# EAGLE board muneeb v6 (EAGLE 9.7.0)
NAMES: Juta
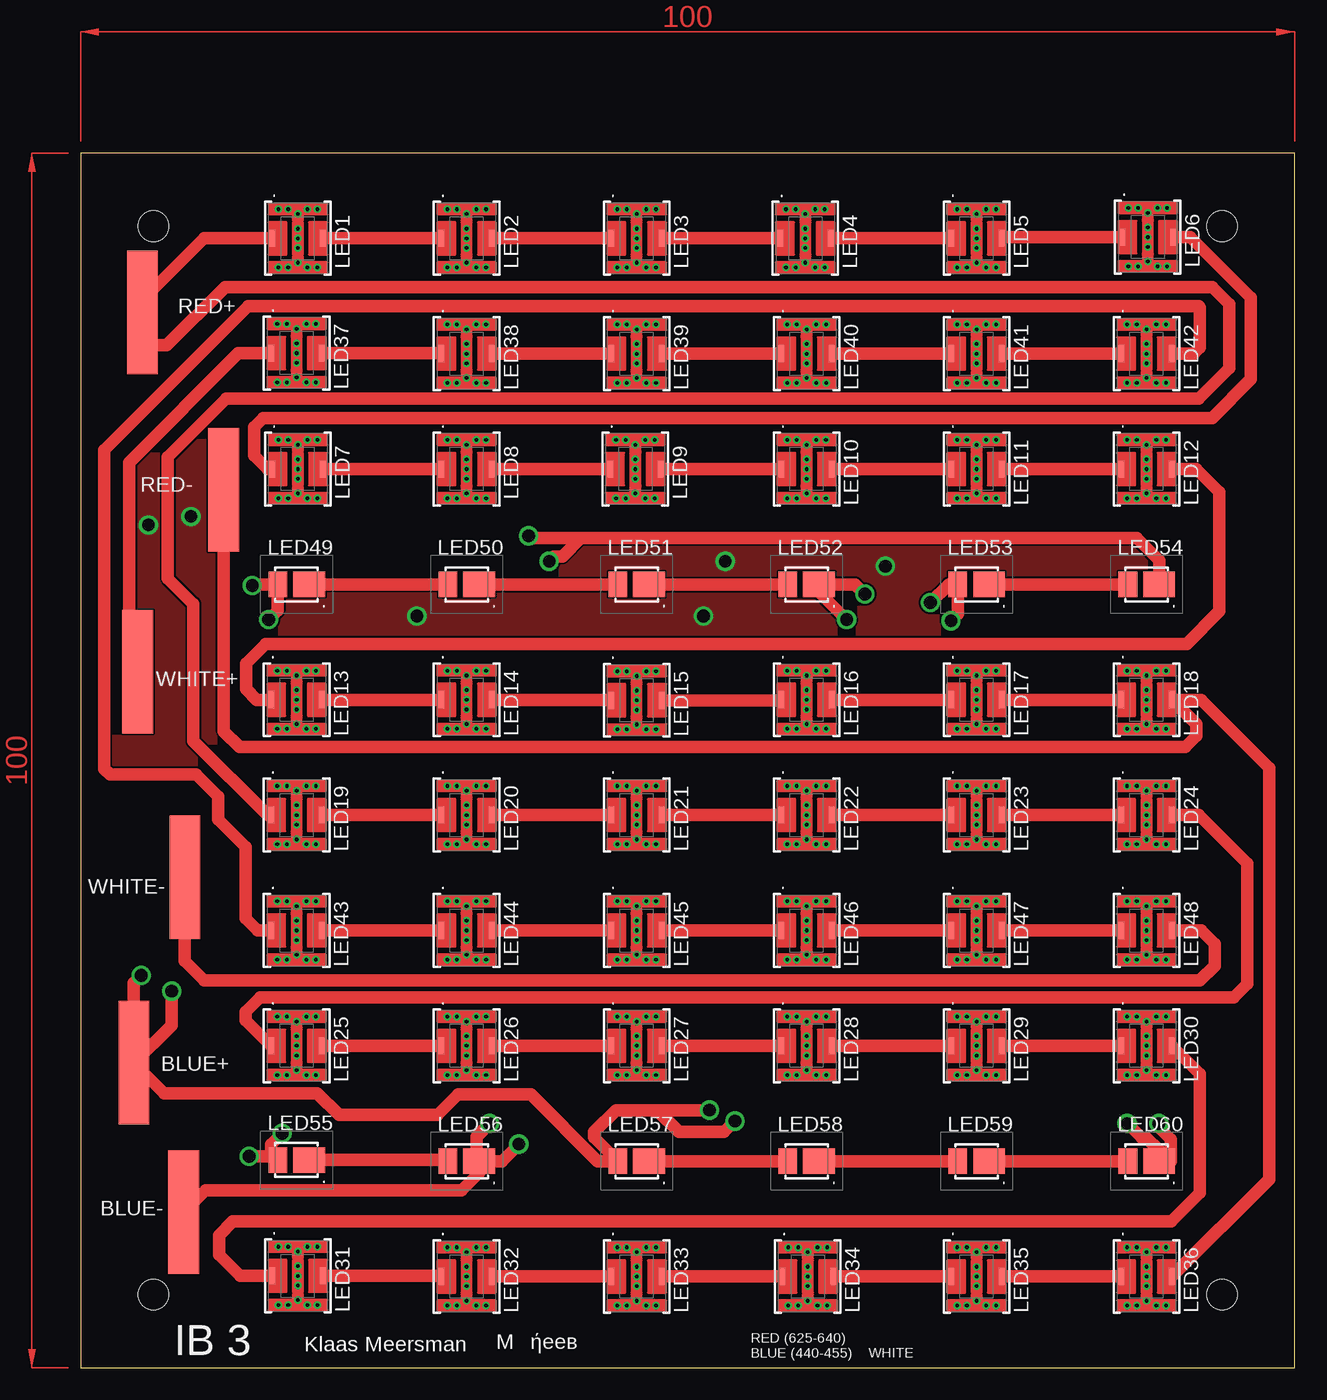
[diagram p0: board, top side]
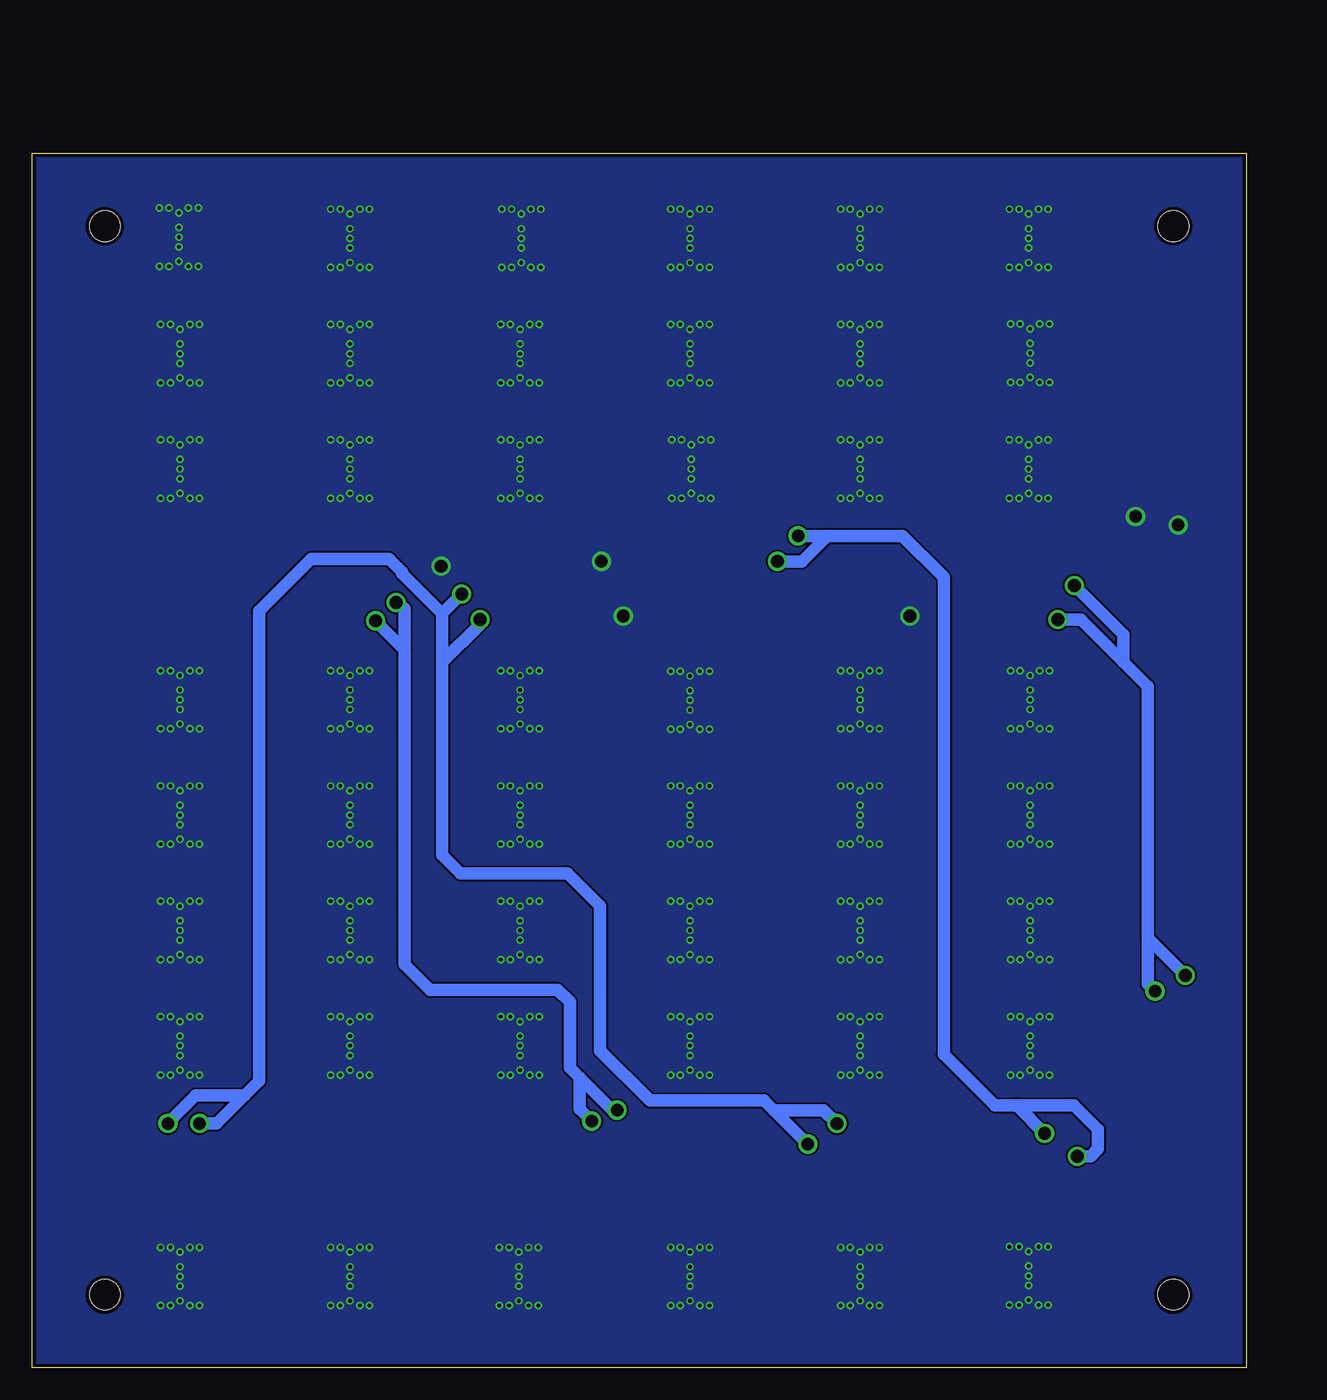
[diagram p1: board, bottom side, seen from below]

Size 99.99 x 100 mm. Coordinates in mm from the lower left corner, seen from the top.
Outline: 0,0 99.99,0 99.99,100 0,100 0,0
Copper layers (1*16): Top 0.035mm / dielectric 1.5mm / Bottom 0.035mm
Design rules "PCBWay_2L_152um-Track": minimum track width 6mil, minimum drill 0.3mm, track to track 6mil, track to pad 6mil, pad to pad 6mil, via to via 6mil, smd to smd 0mil, copper to edge 0.3mm, drill to drill 10mil, minimum pad ring 6mil, minimum via ring 0.1mm, stop-mask expansion 2mil, vias tented up to drill 0.45mm, thermal gap 0.2mm
Net classes: 0 default: width 0.5 mm, drill 0.3 mm, clearance 0.1 mm
Holes 2.5 mm at 6,94 94,94 94,6 6,6

## Footprints (pad centres in the part's own frame; a part is rotated, then mirrored left to right if it is on the bottom)
SOLDERPAD = smd 2.54 x 10.16: 1 0,0
GR_CSSRML.24 = smd 1.4 x 0.5: 1 0,2.1; 2 0,-2.1 | drill 0.3 pad 0.61: GND 0,0; P$1 0.8,0; P$3 -0.8,0; P$5 -2,0; P$6 -2.4,0.8; P$7 -2.4,1.6; P$8 -2.4,-0.8; P$9 -2.4,-1.6; P$11 2,0; P$12 2.4,0.8; P$13 2.4,1.6; P$14 2.4,-0.8; P$15 2.4,-1.6
GD_JTLPSI1.14 = smd 2.62 x 2.1: 1 -1.03,0 | smd 1.53 x 2.1: 2 1.545,0

## Placement (x,y rotation side)
BLUE+  [SOLDERPAD]  4.4,25.1 180 top
BLUE-  [SOLDERPAD]  8.5,12.8 180 top
LED1  [GR_CSSRML.24]  17.9,93 90 top
LED2  [GR_CSSRML.24]  31.8,93 90 top
LED3  [GR_CSSRML.24]  45.8,93 90 top
LED4  [GR_CSSRML.24]  59.7,93 90 top
LED5  [GR_CSSRML.24]  73.8,93 90 top
LED6  [GR_CSSRML.24]  87.9,93.1 90 top
LED7  [GR_CSSRML.24]  17.9,74 90 top
LED8  [GR_CSSRML.24]  31.8,74 90 top
LED9  [GR_CSSRML.24]  45.7,74 90 top
LED10  [GR_CSSRML.24]  59.8,74 90 top
LED11  [GR_CSSRML.24]  73.8,74 90 top
LED12  [GR_CSSRML.24]  87.8,74 90 top
LED13  [GR_CSSRML.24]  17.8,55 90 top
LED14  [GR_CSSRML.24]  31.8,55 90 top
LED15  [GR_CSSRML.24]  45.8,54.96 90 top
LED16  [GR_CSSRML.24]  59.8,55 90 top
LED17  [GR_CSSRML.24]  73.8,55 90 top
LED18  [GR_CSSRML.24]  87.8,55 90 top
LED19  [GR_CSSRML.24]  17.8,45.5 90 top
LED20  [GR_CSSRML.24]  31.8,45.5 90 top
LED21  [GR_CSSRML.24]  45.8,45.5 90 top
LED22  [GR_CSSRML.24]  59.8,45.5 90 top
LED23  [GR_CSSRML.24]  73.8,45.5 90 top
LED24  [GR_CSSRML.24]  87.8,45.5 90 top
LED25  [GR_CSSRML.24]  17.8,26.5 90 top
LED26  [GR_CSSRML.24]  31.8,26.5 90 top
LED27  [GR_CSSRML.24]  45.8,26.5 90 top
LED28  [GR_CSSRML.24]  59.8,26.5 90 top
LED29  [GR_CSSRML.24]  73.8,26.5 90 top
LED30  [GR_CSSRML.24]  87.8,26.5 90 top
LED31  [GR_CSSRML.24]  17.9,7.55 90 top
LED32  [GR_CSSRML.24]  31.8,7.5 90 top
LED33  [GR_CSSRML.24]  45.8,7.5 90 top
LED34  [GR_CSSRML.24]  59.9,7.5 90 top
LED35  [GR_CSSRML.24]  73.8,7.5 90 top
LED36  [GR_CSSRML.24]  87.8,7.5 90 top
LED37  [GR_CSSRML.24]  17.8,83.55 90 top
LED38  [GR_CSSRML.24]  31.8,83.5 90 top
LED39  [GR_CSSRML.24]  45.8,83.5 90 top
LED40  [GR_CSSRML.24]  59.8,83.5 90 top
LED41  [GR_CSSRML.24]  73.8,83.5 90 top
LED42  [GR_CSSRML.24]  87.8,83.5 90 top
LED43  [GR_CSSRML.24]  17.8,36 90 top
LED44  [GR_CSSRML.24]  31.8,36 90 top
LED45  [GR_CSSRML.24]  45.8,36 90 top
LED46  [GR_CSSRML.24]  59.8,36 90 top
LED47  [GR_CSSRML.24]  73.8,36 90 top
LED48  [GR_CSSRML.24]  87.8,36 90 top
LED49  [GD_JTLPSI1.14]  17.8,64.5 180 top
LED50  [GD_JTLPSI1.14]  31.8,64.5 180 top
LED51  [GD_JTLPSI1.14]  45.8,64.5 180 top
LED52  [GD_JTLPSI1.14]  59.8,64.5 180 top
LED53  [GD_JTLPSI1.14]  73.8,64.5 180 top
LED54  [GD_JTLPSI1.14]  87.8,64.5 180 top
LED55  [GD_JTLPSI1.14]  17.8,17.1 180 top
LED56  [GD_JTLPSI1.14]  31.8,17 180 top
LED57  [GD_JTLPSI1.14]  45.8,17 180 top
LED58  [GD_JTLPSI1.14]  59.8,17 180 top
LED59  [GD_JTLPSI1.14]  73.8,17 180 top
LED60  [GD_JTLPSI1.14]  87.8,17 180 top
RED+  [SOLDERPAD]  5.1,86.9 180 top
RED-  [SOLDERPAD]  11.8,72.3 180 top
WHITE+  [SOLDERPAD]  4.7,57.3 180 top
WHITE-  [SOLDERPAD]  8.6,40.4 180 top

## Library data of the parts
BLUE+ BLUE- RED+ RED- WHITE+ WHITE- = LibraryLEDs
LED1-LED48 = OSRAM LED
LED49-LED60 = OSRAM LED; DESCRIPTION: High Power LEDs - Single Color 2835 Mid-Power ColorFar Red 720-740nm; HEIGHT: mm; MANUFACTURER_NAME: CREE LED; MANUFACTURER_PART_NUMBER: JE2835AFR-N-0001A0000-N0000001; MOUSER_PART_NUMBER: 941-JE2835AFRN01AN; MOUSER_PRICE-STOCK: https://www.mouser.co.uk/ProductDetail/Cree-LED/JE2835AFR-N-0001A0000-N0000001?qs=tlsG%2FOw5FFhxeS5Ond46kw%3D%3D

## Nets
GND: LED1.GND LED1.P$1 LED1.P$3 LED1.P$5 LED1.P$6 LED1.P$7 LED1.P$8 LED1.P$9 LED1.P$11 LED1.P$12 LED1.P$13 LED1.P$14 LED1.P$15 LED2.GND LED2.P$1 LED2.P$3 LED2.P$5 LED2.P$6 LED2.P$7 LED2.P$8 LED2.P$9 LED2.P$11 LED2.P$12 LED2.P$13 LED2.P$14 LED2.P$15 LED3.GND LED3.P$1 LED3.P$3 LED3.P$5 LED3.P$6 LED3.P$7 LED3.P$8 LED3.P$9 LED3.P$11 LED3.P$12 LED3.P$13 LED3.P$14 LED3.P$15 LED4.GND LED4.P$1 LED4.P$3 LED4.P$5 LED4.P$6 LED4.P$7 LED4.P$8 LED4.P$9 LED4.P$11 LED4.P$12 LED4.P$13 LED4.P$14 LED4.P$15 LED5.GND LED5.P$1 LED5.P$3 LED5.P$5 LED5.P$6 LED5.P$7 LED5.P$8 LED5.P$9 LED5.P$11 LED5.P$12 LED5.P$13 LED5.P$14 LED5.P$15 LED6.GND LED6.P$1 LED6.P$3 LED6.P$5 LED6.P$6 LED6.P$7 LED6.P$8 LED6.P$9 LED6.P$11 LED6.P$12 LED6.P$13 LED6.P$14 LED6.P$15 LED7.GND LED7.P$1 LED7.P$3 LED7.P$5 LED7.P$6 LED7.P$7 LED7.P$8 LED7.P$9 LED7.P$11 LED7.P$12 LED7.P$13 LED7.P$14 LED7.P$15 LED8.GND LED8.P$1 LED8.P$3 LED8.P$5 LED8.P$6 LED8.P$7 LED8.P$8 LED8.P$9 LED8.P$11 LED8.P$12 LED8.P$13 LED8.P$14 LED8.P$15 LED9.GND LED9.P$1 LED9.P$3 LED9.P$5 LED9.P$6 LED9.P$7 LED9.P$8 LED9.P$9 LED9.P$11 LED9.P$12 LED9.P$13 LED9.P$14 LED9.P$15 LED10.GND LED10.P$1 LED10.P$3 LED10.P$5 LED10.P$6 LED10.P$7 LED10.P$8 LED10.P$9 LED10.P$11 LED10.P$12 LED10.P$13 LED10.P$14 LED10.P$15 LED11.GND LED11.P$1 LED11.P$3 LED11.P$5 LED11.P$6 LED11.P$7 LED11.P$8 LED11.P$9 LED11.P$11 LED11.P$12 LED11.P$13 LED11.P$14 LED11.P$15 LED12.GND LED12.P$1 LED12.P$3 LED12.P$5 LED12.P$6 LED12.P$7 LED12.P$8 LED12.P$9 LED12.P$11 LED12.P$12 LED12.P$13 LED12.P$14 LED12.P$15 LED13.GND LED13.P$1 LED13.P$3 LED13.P$5 LED13.P$6 LED13.P$7 LED13.P$8 LED13.P$9 LED13.P$11 LED13.P$12 LED13.P$13 LED13.P$14 LED13.P$15 LED14.GND LED14.P$1 LED14.P$3 LED14.P$5 LED14.P$6 LED14.P$7 LED14.P$8 LED14.P$9 LED14.P$11 LED14.P$12 LED14.P$13 LED14.P$14 LED14.P$15 LED15.GND LED15.P$1 LED15.P$3 LED15.P$5 LED15.P$6 LED15.P$7 LED15.P$8 LED15.P$9 LED15.P$11 LED15.P$12 LED15.P$13 LED15.P$14 LED15.P$15 LED16.GND LED16.P$1 LED16.P$3 LED16.P$5 LED16.P$6 LED16.P$7 LED16.P$8 LED16.P$9 LED16.P$11 LED16.P$12 LED16.P$13 LED16.P$14 LED16.P$15 LED17.GND LED17.P$1 LED17.P$3 LED17.P$5 LED17.P$6 LED17.P$7 LED17.P$8 LED17.P$9 LED17.P$11 LED17.P$12 LED17.P$13 LED17.P$14 LED17.P$15 LED18.GND LED18.P$1 LED18.P$3 LED18.P$5 LED18.P$6 LED18.P$7 LED18.P$8 LED18.P$9 LED18.P$11 LED18.P$12 LED18.P$13 LED18.P$14 LED18.P$15 LED19.GND LED19.P$1 LED19.P$3 LED19.P$5 LED19.P$6 LED19.P$7 LED19.P$8 LED19.P$9 LED19.P$11 LED19.P$12 LED19.P$13 LED19.P$14 LED19.P$15 LED20.GND LED20.P$1 LED20.P$3 LED20.P$5 LED20.P$6 LED20.P$7 LED20.P$8 LED20.P$9 LED20.P$11 LED20.P$12 LED20.P$13 LED20.P$14 LED20.P$15 LED21.GND LED21.P$1 LED21.P$3 LED21.P$5 LED21.P$6 LED21.P$7 LED21.P$8 LED21.P$9 LED21.P$11 LED21.P$12 LED21.P$13 LED21.P$14 LED21.P$15 LED22.GND LED22.P$1 LED22.P$3 LED22.P$5 LED22.P$6 LED22.P$7 LED22.P$8 LED22.P$9 LED22.P$11 LED22.P$12 LED22.P$13 LED22.P$14 LED22.P$15 LED23.GND LED23.P$1 LED23.P$3 LED23.P$5 LED23.P$6 LED23.P$7 LED23.P$8 LED23.P$9 LED23.P$11 LED23.P$12 LED23.P$13 LED23.P$14 LED23.P$15 LED24.GND LED24.P$1 LED24.P$3 LED24.P$5 LED24.P$6 LED24.P$7 LED24.P$8 LED24.P$9 LED24.P$11 LED24.P$12 LED24.P$13 LED24.P$14 LED24.P$15 LED25.GND LED25.P$1 LED25.P$3 LED25.P$5 LED25.P$6 LED25.P$7 LED25.P$8 LED25.P$9 LED25.P$11 LED25.P$12 LED25.P$13 LED25.P$14 LED25.P$15 LED26.GND LED26.P$1 LED26.P$3 LED26.P$5 LED26.P$6 LED26.P$7 LED26.P$8 LED26.P$9 LED26.P$11 LED26.P$12 LED26.P$13 LED26.P$14 LED26.P$15 LED27.GND LED27.P$1 LED27.P$3 LED27.P$5 LED27.P$6 LED27.P$7 LED27.P$8 LED27.P$9 LED27.P$11 LED27.P$12 LED27.P$13 LED27.P$14 LED27.P$15 LED28.GND LED28.P$1 LED28.P$3 LED28.P$5 LED28.P$6 LED28.P$7 LED28.P$8 LED28.P$9 LED28.P$11 LED28.P$12 LED28.P$13 LED28.P$14 LED28.P$15 LED29.GND LED29.P$1 LED29.P$3 LED29.P$5 LED29.P$6 LED29.P$7 LED29.P$8 LED29.P$9 LED29.P$11 LED29.P$12 LED29.P$13 LED29.P$14 LED29.P$15 LED30.GND LED30.P$1 LED30.P$3 LED30.P$5 LED30.P$6 LED30.P$7 LED30.P$8 LED30.P$9 LED30.P$11 LED30.P$12 LED30.P$13 LED30.P$14 LED30.P$15 LED31.GND LED31.P$1 LED31.P$3 LED31.P$5 LED31.P$6 LED31.P$7 LED31.P$8 LED31.P$9 LED31.P$11 LED31.P$12 LED31.P$13 LED31.P$14 LED31.P$15 LED32.GND LED32.P$1 LED32.P$3 LED32.P$5 LED32.P$6 LED32.P$7 LED32.P$8 LED32.P$9 LED32.P$11 LED32.P$12 LED32.P$13 LED32.P$14 LED32.P$15 LED33.GND LED33.P$1 LED33.P$3 LED33.P$5 LED33.P$6 LED33.P$7 LED33.P$8 LED33.P$9 LED33.P$11 LED33.P$12 LED33.P$13 LED33.P$14 LED33.P$15 LED34.GND LED34.P$1 LED34.P$3 LED34.P$5 LED34.P$6 LED34.P$7 LED34.P$8 LED34.P$9 LED34.P$11 LED34.P$12 LED34.P$13 LED34.P$14 LED34.P$15 LED35.GND LED35.P$1 LED35.P$3 LED35.P$5 LED35.P$6 LED35.P$7 LED35.P$8 LED35.P$9 LED35.P$11 LED35.P$12 LED35.P$13 LED35.P$14 LED35.P$15 LED36.GND LED36.P$1 LED36.P$3 LED36.P$5 LED36.P$6 LED36.P$7 LED36.P$8 LED36.P$9 LED36.P$11 LED36.P$12 LED36.P$13 LED36.P$14 LED36.P$15 LED37.GND LED37.P$1 LED37.P$3 LED37.P$5 LED37.P$6 LED37.P$7 LED37.P$8 LED37.P$9 LED37.P$11 LED37.P$12 LED37.P$13 LED37.P$14 LED37.P$15 LED38.GND LED38.P$1 LED38.P$3 LED38.P$5 LED38.P$6 LED38.P$7 LED38.P$8 LED38.P$9 LED38.P$11 LED38.P$12 LED38.P$13 LED38.P$14 LED38.P$15 LED39.GND LED39.P$1 LED39.P$3 LED39.P$5 LED39.P$6 LED39.P$7 LED39.P$8 LED39.P$9 LED39.P$11 LED39.P$12 LED39.P$13 LED39.P$14 LED39.P$15 LED40.GND LED40.P$1 LED40.P$3 LED40.P$5 LED40.P$6 LED40.P$7 LED40.P$8 LED40.P$9 LED40.P$11 LED40.P$12 LED40.P$13 LED40.P$14 LED40.P$15 LED41.GND LED41.P$1 LED41.P$3 LED41.P$5 LED41.P$6 LED41.P$7 LED41.P$8 LED41.P$9 LED41.P$11 LED41.P$12 LED41.P$13 LED41.P$14 LED41.P$15 LED42.GND LED42.P$1 LED42.P$3 LED42.P$5 LED42.P$6 LED42.P$7 LED42.P$8 LED42.P$9 LED42.P$11 LED42.P$12 LED42.P$13 LED42.P$14 LED42.P$15 LED43.GND LED43.P$1 LED43.P$3 LED43.P$5 LED43.P$6 LED43.P$7 LED43.P$8 LED43.P$9 LED43.P$11 LED43.P$12 LED43.P$13 LED43.P$14 LED43.P$15 LED44.GND LED44.P$1 LED44.P$3 LED44.P$5 LED44.P$6 LED44.P$7 LED44.P$8 LED44.P$9 LED44.P$11 LED44.P$12 LED44.P$13 LED44.P$14 LED44.P$15 LED45.GND LED45.P$1 LED45.P$3 LED45.P$5 LED45.P$6 LED45.P$7 LED45.P$8 LED45.P$9 LED45.P$11 LED45.P$12 LED45.P$13 LED45.P$14 LED45.P$15 LED46.GND LED46.P$1 LED46.P$3 LED46.P$5 LED46.P$6 LED46.P$7 LED46.P$8 LED46.P$9 LED46.P$11 LED46.P$12 LED46.P$13 LED46.P$14 LED46.P$15 LED47.GND LED47.P$1 LED47.P$3 LED47.P$5 LED47.P$6 LED47.P$7 LED47.P$8 LED47.P$9 LED47.P$11 LED47.P$12 LED47.P$13 LED47.P$14 LED47.P$15 LED48.GND LED48.P$1 LED48.P$3 LED48.P$5 LED48.P$6 LED48.P$7 LED48.P$8 LED48.P$9 LED48.P$11 LED48.P$12 LED48.P$13 LED48.P$14 LED48.P$15
N$1: LED1.1 LED19.1 RED+.1
N$2: LED1.2 LED2.1
N$3: LED37.1 WHITE+.1
N$4: LED48.2 WHITE-.1
N$5: LED37.2 LED38.1
N$6: LED38.2 LED39.1
N$7: LED39.2 LED40.1
N$8: LED40.2 LED41.1
N$9: LED41.2 LED42.1
N$10: LED42.2 LED43.1
N$12: LED2.2 LED3.1
N$13: LED3.2 LED4.1
N$14: LED4.2 LED5.1
N$15: LED5.2 LED6.1
N$16: LED6.2 LED7.1
N$17: LED43.2 LED44.1
N$18: LED44.2 LED45.1
N$19: LED45.2 LED46.1
N$20: LED46.2 LED47.1
N$21: BLUE+.1 LED49.2 LED53.2 LED57.2
N$22: LED7.2 LED8.1
N$23: BLUE-.1 LED52.1 LED56.1 LED60.1
N$24: LED8.2 LED9.1
N$25: LED10.2 LED11.1
N$26: LED11.2 LED12.1
N$27: LED12.2 LED13.1
N$28: LED13.2 LED14.1
N$29: LED49.1 LED50.2
N$30: LED19.2 LED20.1
N$31: LED20.2 LED21.1
N$32: LED50.1 LED51.2
N$33: LED51.1 LED52.2
N$34: LED53.1 LED54.2
N$35: LED14.2 LED15.1
N$36: LED15.2 LED16.1
N$37: LED16.2 LED17.1
N$38: LED17.2 LED18.1
N$39: LED54.1 LED55.2
N$40: LED55.1 LED56.2
N$41: LED57.1 LED58.2
N$42: LED58.1 LED59.2
N$43: LED59.1 LED60.2
N$44: LED47.2 LED48.1
N$46: LED18.2 LED36.2 RED-.1
N$47: LED9.2 LED10.1
N$48: LED21.2 LED22.1
N$49: LED22.2 LED23.1
N$50: LED23.2 LED24.1
N$51: LED24.2 LED25.1
N$52: LED25.2 LED26.1
N$53: LED26.2 LED27.1
N$54: LED28.2 LED29.1
N$55: LED29.2 LED30.1
N$56: LED30.2 LED31.1
N$57: LED31.2 LED32.1
N$58: LED32.2 LED33.1
N$59: LED33.2 LED34.1
N$60: LED34.2 LED35.1
N$61: LED35.2 LED36.1
N$63: LED27.2 LED28.1

## Tracks (layer width: path | path; a pad name or v marks a point on that pad's centre or on a via)
GND  (via drill 1.05)
  other vias: 51.3,61.9 27.7,61.9 53.1,66.4 66.3,66 9.1,70.1 5.6,69.4
  pour Bottom: 0.08,0.08 99.92,0.08 99.92,99.92 0.08,99.92
  pour Top: 0.51,0.51 99.49,0.51 99.49,99.49 0.51,99.49
N$1
  Top 1.016: LED1.1 10.2,93 5.1,87.9 RED+.1 5.1,84.3 5.2,84.2 7.1,84.2 11.9,89 93.2,89 94.6,87.6 94.6,82.3 92.1,79.8 12.02,79.8 7.2,74.98 7.2,65 9.3,62.9 9.3,51.6 15.4,45.5 LED19.1
N$2
  Top 1.016: LED1.2 LED2.1
N$3
  Top 1.016: LED37.1 13,83.55 4,74.55 4,58 WHITE+.1
N$4
  Top 1.016: LED48.2 92.3,36 93.4,34.9 93.4,33.1 92.2,31.9 10.2,31.9 8.6,33.5 WHITE-.1
N$5
  Top 1.016: LED37.2 29.65,83.55 LED38.1
N$6
  Top 1.016: LED38.2 LED39.1
N$7
  Top 1.016: LED39.2 LED40.1
N$8
  Top 1.016: LED40.2 LED41.1
N$9
  Top 1.016: LED41.2 LED42.1
N$10
  Top 1.016: LED42.2 91.7,83.5 92.2,84 92.2,87.3 92.1,87.4 13.8,87.4 1.97,75.57 1.97,49.32 2.45,48.84 9.54,48.84 11.33,47.05 11.33,45.15 13.6,42.88 13.6,37 14.6,36 LED43.1
N$12
  Top 1.016: LED3.1 LED2.2
N$13
  Top 1.016: LED3.2 LED4.1
N$14
  Top 1.016: LED5.1 LED4.2
N$15
  Top 1.016: LED5.2 76,93.1 LED6.1
N$16
  Top 1.016: LED6.2 91.4,93.1 96.4,88.1 96.4,81.4 93.2,78.2 15.04,78.2 14.3,77.47 14.3,75.1 15.4,74 LED7.1
N$17
  Top 1.016: LED43.2 LED44.1
N$18
  Top 1.016: LED44.2 LED45.1
N$19
  Top 1.016: LED45.2 LED46.1
N$20
  Top 1.016: LED46.2 LED47.1
N$21  (via drill 1.05)
  Top 1.016: v5,32.3 4.4,31.7 BLUE+.1 | v7.5,31 7.5,28.2 BLUE+.1 | v15.5,61.6 16.25,62.35 LED49.2 14.25,64.5 v14.15,64.4 | 47.5,21.2 44.1,21.2 42.3,19.4 42.3,18.95 LED57.2 42.6,17 37.1,22.5 31.1,22.5 29.4,20.8 21.3,20.8 19.5,22.6 6.9,22.6 BLUE+.1 | 47.5,21.2 v51.8,21.2 | v53.9,20.3 53,19.4 49.3,19.4 47.5,21.2 | v70,63 71.5,64.5 LED53.2 72.25,62.05 v71.7,61.5
  Bottom 1.016: 8.1,35.4 8.1,56.1 10.1,58.1 | v5,32.3 8.1,35.4 | 10.1,58.1 13.6,61.6 v15.5,61.6 | 8.1,35.4 8.1,31.6 v7.5,31 | 10.1,58.1 10.1,60.35 v14.15,64.4 | v51.8,21.2 52.2,21.2 54.9,23.9 | 54.9,23.9 54.9,21.3 v53.9,20.3 | 54.9,23.9 55.7,24.7 55.7,30.1 56.7,31.1 67.2,31.1 69.3,33.2 69.3,59.1 | 69.3,59.1 69.3,62.5 69.8,63 v70,63 | 69.3,59.1 v71.7,61.5
N$22
  Top 1.016: LED7.2 LED8.1
N$23  (via drill 1.05)
  Top 1.016: v64.6,63.7 63.8,64.5 LED52.1 60.83,63.87 v63.1,61.6 | v33.7,20.1 32.6,19 32.6,17.23 LED56.1 | v36.1,18.4 34.7,17 LED56.1 | v88.8,20.1 88.8,19.8 89.8,18.8 89.8,17 LED60.1 88.83,17.87 87.8,18.9 87.4,18.9 v86.2,20.1 | LED56.1 32.83,16.03 31.4,14.6 10.3,14.6 BLUE-.1
  Bottom 1.016: v64.6,63.7 66.2,62.1 | 66.2,62.1 66.2,58.1 | 66.2,58.1 66.2,42.2 64.7,40.7 55.9,40.7 53.2,38 53.2,26.1 49.1,22 39.7,22 38.9,21.2 | v36.1,18.4 38.9,21.2 | 38.9,21.2 34.8,21.2 v33.7,20.1 | 66.2,58.1 63.1,61.2 v63.1,61.6 | 66.2,62.1 69.5,65.4 69.5,65.5 70.6,66.6 77,66.6 81.3,62.3 81.3,23.6 82.5,22.4 | v86.2,20.1 84.8,20.1 82.5,22.4 | v88.8,20.1 86.5,22.4 82.5,22.4
N$24
  Top 1.016: LED9.1 LED8.2
N$25
  Top 1.016: LED10.2 LED11.1
N$26
  Top 1.016: LED11.2 LED12.1
N$27
  Top 1.016: LED12.2 91.9,74 93.8,72.1 93.8,62.3 91.1,59.6 15.23,59.6 13.63,58 13.63,55.87 14.5,55 LED13.1
N$28
  Top 1.016: LED13.2 LED14.1
N$29
  Top 1.016: LED50.2 LED49.1
N$30
  Top 1.016: LED19.2 LED20.1
N$31
  Top 1.016: LED20.2 LED21.1
N$32
  Top 1.016: LED50.1 LED51.2
N$33
  Top 1.016: LED51.1 LED52.2
N$34
  Top 1.016: LED54.2 LED53.1
N$35
  Top 1.016: LED14.2 43.66,55 LED15.1
N$36
  Top 1.016: LED15.2 57.66,54.96 LED16.1
N$37
  Top 1.016: LED17.1 LED16.2
N$38
  Top 1.016: LED17.2 LED18.1
N$39  (via drill 1.05)
  Top 1.016: LED54.1 88.83,66.47 87,68.3 41.2,68.3 | 41.2,68.3 37.1,68.3 v36.9,68.5 | 41.2,68.3 39.7,66.8 39,66.8 v38.6,66.4 | v16.6,19.3 15.7,18.4 15.7,17.66 LED55.2 15.96,17.4 v13.9,17.4
  Bottom 1.016: v36.9,68.5 34.5,68.5 | 34.5,68.5 28.3,68.5 24.9,65.1 24.9,25.8 20.7,21.6 18.9,21.6 | 18.9,21.6 14.2,21.6 12.2,19.6 12.2,18 12.8,17.4 v13.9,17.4 | v16.6,19.3 18.9,21.6 | 34.5,68.5 36.6,66.4 v38.6,66.4
N$40
  Top 1.016: LED55.1 30.16,17.1 LED56.2
N$41
  Top 1.016: LED57.1 LED58.2
N$42
  Top 1.016: LED58.1 LED59.2
N$43
  Top 1.016: LED59.1 LED60.2
N$44
  Top 1.016: LED47.2 LED48.1
N$46
  Top 1.016: RED-.1 11.8,52.4 13.1,51.1 91,51.1 91.9,52 91.9,53 LED18.2 92.3,55 97.9,49.4 97.9,15.5 LED36.2
N$47
  Top 1.016: LED9.2 LED10.1
N$48
  Top 1.016: LED21.2 LED22.1
N$49
  Top 1.016: LED22.2 LED23.1
N$50
  Top 1.016: LED23.2 LED24.1
N$51
  Top 1.016: LED25.1 13.6,28.6 13.6,29.3 14.8,30.5 95,30.5 96.1,31.6 96.1,41.5 92.1,45.5 LED24.2
N$52
  Top 1.016: LED25.2 LED26.1
N$53
  Top 1.016: LED26.2 LED27.1
N$54
  Top 1.016: LED28.2 LED29.1
N$55
  Top 1.016: LED29.2 LED30.1
N$56
  Top 1.016: LED30.2 92.2,24.2 92.2,14.4 89.83,12.03 12.53,12.03 11.4,10.9 11.4,9.3 13.15,7.55 LED31.1
N$57
  Top 1.016: LED31.2 29.65,7.55 LED32.1
N$58
  Top 1.016: LED32.2 LED33.1
N$59
  Top 1.016: LED33.2 LED34.1
N$60
  Top 1.016: LED34.2 LED35.1
N$61
  Top 1.016: LED35.2 LED36.1
N$63
  Top 1.016: LED27.2 LED28.1
(copper drawn outside any net)
  shapes: Top area x2

## Text on the board
tPlace: M𝔲ήeeв | IB 3 | Klaas Meersman | RED (625-640) / BLUE (440-455) | WHITE